# Altium PCB ampPcb.PcbDoc
Units mil, origin at the board's own origin, x right, y up, seen from the top; angles counter-clockwise.
Board outline 6000 x 4000 mil, 2 copper layers (Top Layer, Bottom Layer); 72 components, 50 nets, 181 pads, 0 vias.
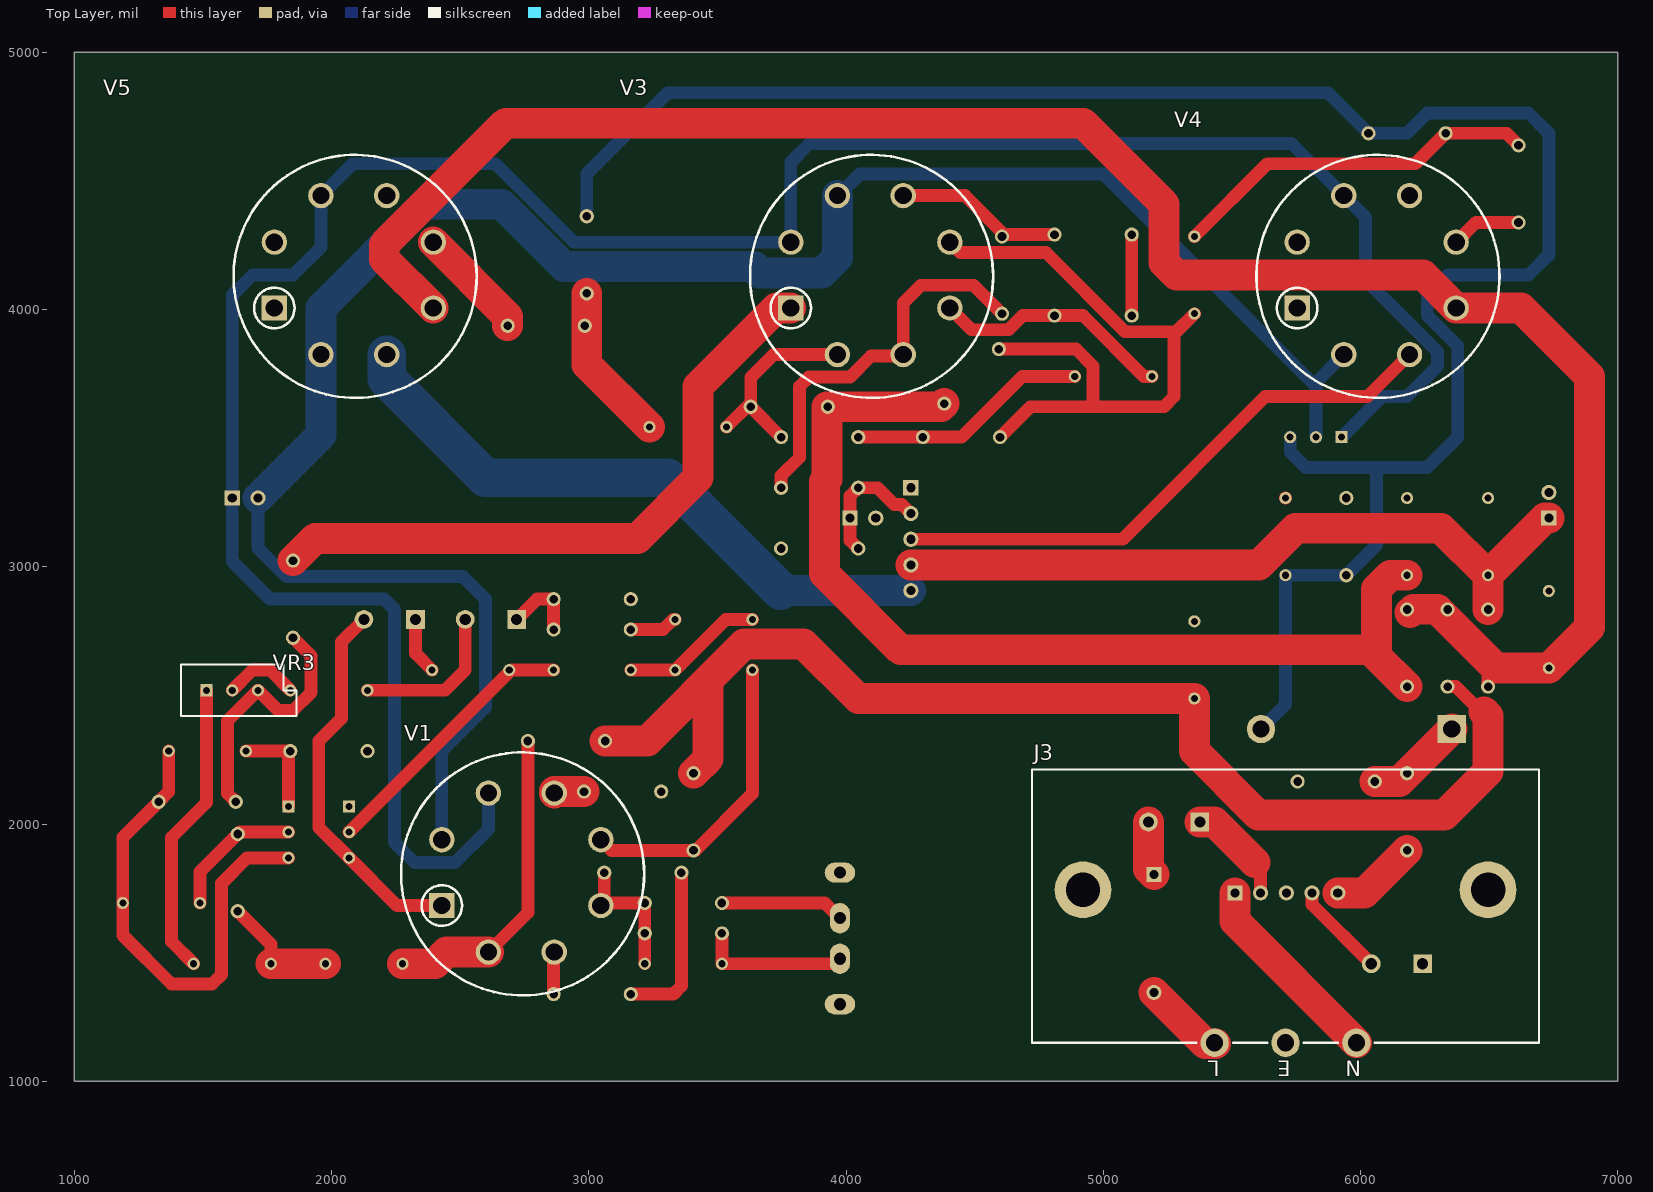
[diagram p0: Top Layer view]
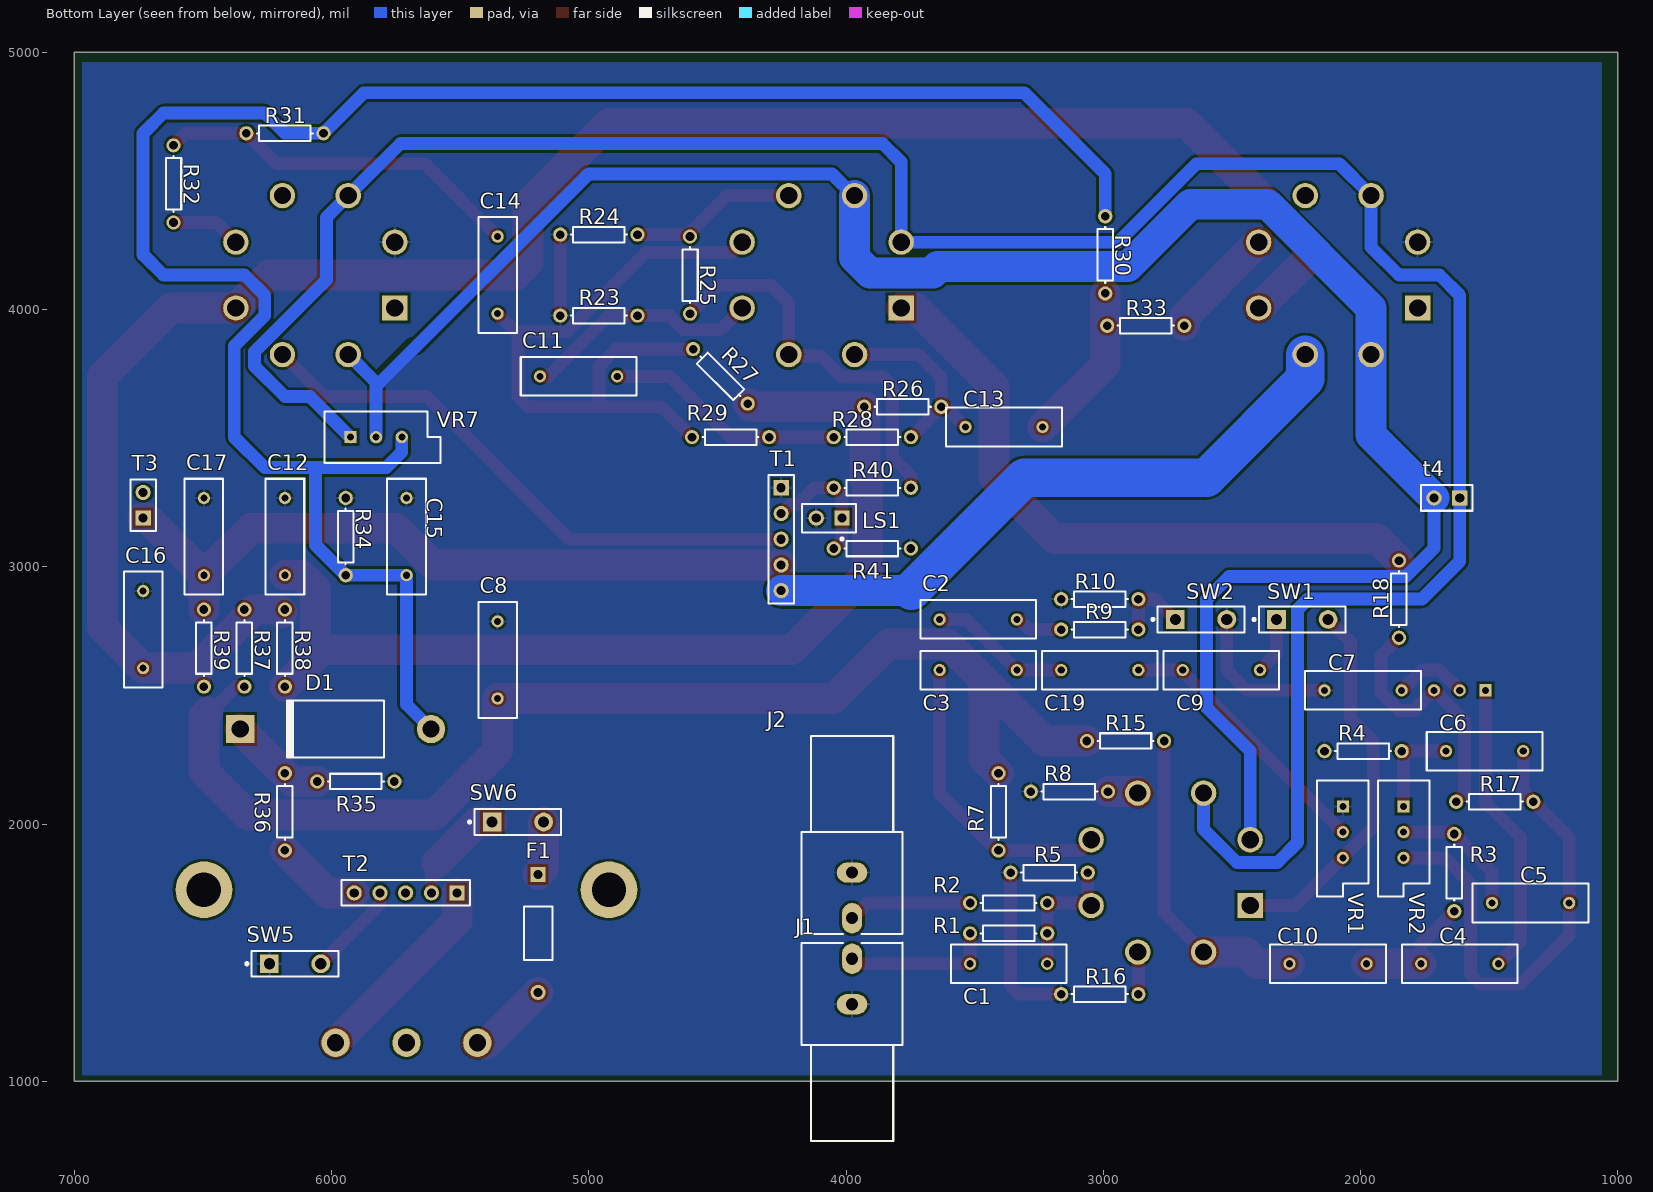
[diagram p1: Bottom Layer view, seen from below]
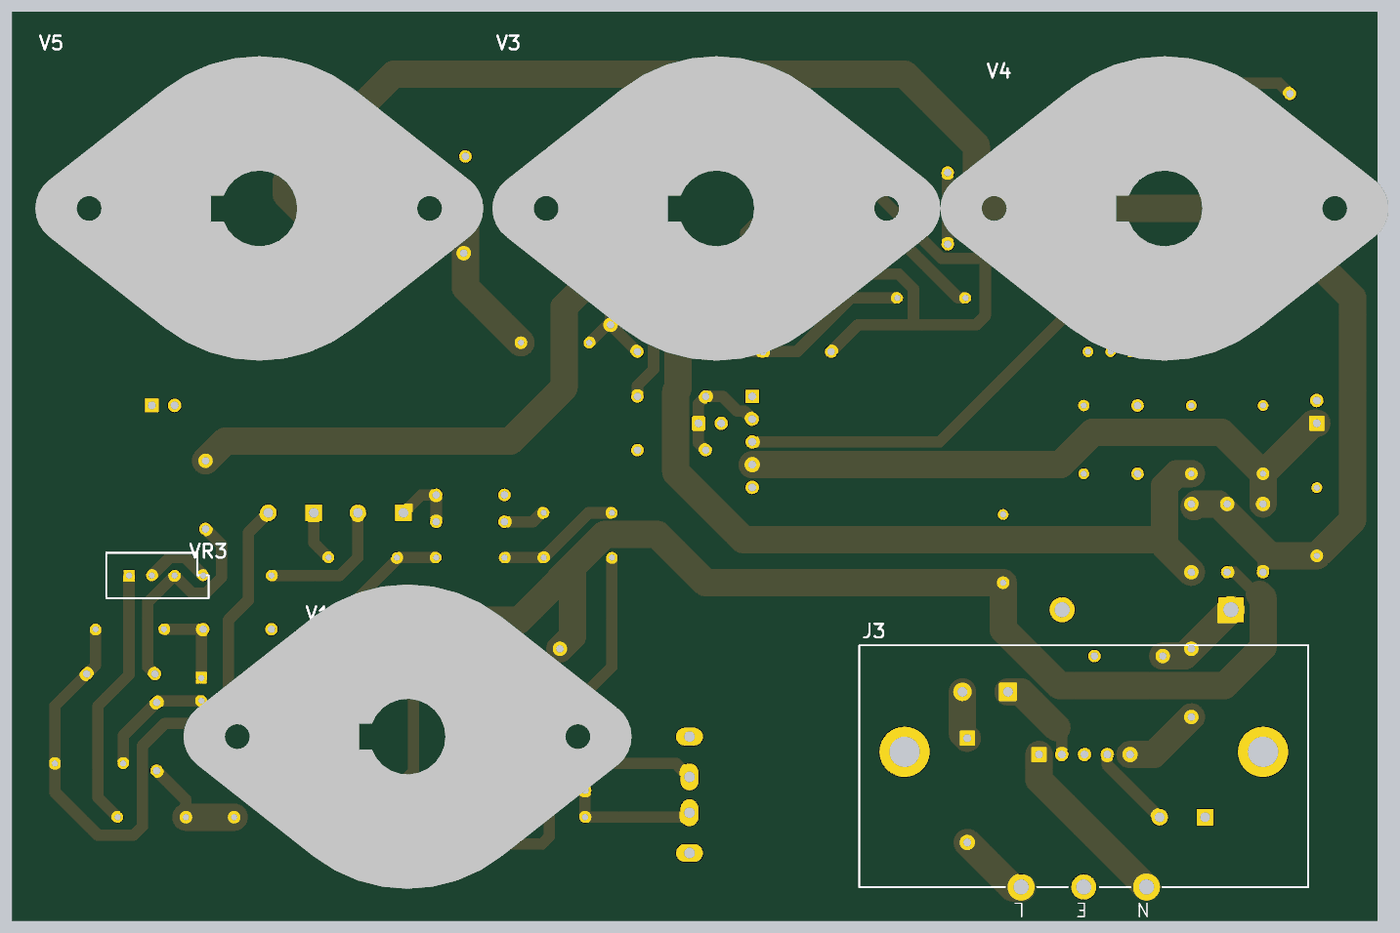
[diagram p2: 3D render of the assembled board from above, using the file's embedded part models]

## Layer stack, top to bottom
Top Layer: signal copper 1.4
Dielectric: dielectric 12.6, FR-4, Dk 4.8
Bottom Layer: signal copper 1.4

## Board outline
1000,1000 7000,1000 7000,5000 1000,5000

## Design rules (kind name [scope] priority, off if disabled: settings)
Clearance [All] p1: gap=10
PolygonConnect [All] p1: connectstyle=Relief reliefconductorwidth=10 reliefentries=4 polygonreliefangle="90 Angle"
RoomDefinition Designator [InComponentClass('Designator')] p1: confinementstyle=ConfineIn formatcopy=TRUE lockcomponents=FALSE outline 6968.5,3510.83 4173.23,3510.83 4173.23,991.14 6968.5,991.14
RoomDefinition PA [InComponentClass('PA')] p2: confinementstyle=ConfineIn formatcopy=TRUE lockcomponents=FALSE outline 1023.62,1023.62 3818.9,1023.62 3818.9,3031.5 1023.62,3031.5
RoomDefinition main [InComponentClass('main')] p3: confinementstyle=ConfineIn formatcopy=TRUE lockcomponents=FALSE outline 4488.19,2716.54 4409.45,2716.54 4409.45,2952.76 4488.19,2952.76
RoomDefinition A [InComponentClass('A')] p4: confinementstyle=ConfineIn formatcopy=TRUE lockcomponents=FALSE outline 1062.99,3449.61 6850.39,3449.61 6850.39,4921.26 1062.99,4921.26
RoutingVias [All] p1: holewidth=28 width=50 viastyle="Through Hole" minholewidth=28 minwidth=50 maxholewidth=28 maxwidth=50
SilkscreenOverComponentPads [All] p1: minsilkscreentomaskgap=10
SolderMaskExpansion [All] p1: expansion=4
Width [All] p1: maxlimit=120 minlimit=10 preferedwidth=50
27 further rules are at their usual default settings.

## Classes and differential pairs
component class Designator: C8 C12 C15 C16 C17 D1 F1 J3 R34 R35 R36 R37 R38 R39 SW5 SW6 T2 T3 t4 VR7
component class PA: C1 C2 C3 C4 C5 C6 C7 C9 C10 C19 R1 R2 R3 R4 R5 R7 R8 R9 R10 R15 R16 R17 R18 SW1 SW2 V1 VR1 VR2 VR3
component class main: J1 J2 LS1
component class A: C11 C13 C14 R23 R24 R25 R26 R27 R28 R29 R30 R31 R32 R33 R40 R41 T1 V3 V4 V5

## Components (designator, comment, footprint, x,y, rotation, side; value= is the part's Value field where it differs from the comment)
C1 "Cap" RAD-0.3#1 3367.72,1456.69 r270 bottom
C2 "Cap" RAD-0.3#2 3485.83,2795.28 r0 bottom
C3 "Cap" RAD-0.3#2 3485.83,2598.43 r180 bottom
C4 "Cap" RAD-0.3#2 1614.17,1456.69 r0 bottom
C5 "Cap" RAD-0.3#2 1338.58,1692.91 r180 bottom
C6 "Cap" RAD-0.3#2 1517.32,2283.46 r180 bottom
C7 "Cap" RAD-0.3#2 1989.76,2519.68 r180 bottom
C8 "500V" RAD-0.3#1 5354.33,2637.8 r180 bottom
C9 "Cap" RAD-0.3#2 2540.94,2598.43 r0 bottom
C10 "Cap" RAD-0.3#2 2125.98,1456.69 r180 bottom
C11 "Cap" RAD-0.3#1 5039.37,3740.16 r270 bottom
C12 "500V" RAD-0.3#1 6181.1,3117.13 r180 bottom
C13 "Cap" RAD-0.3#1 3385.83,3543.31 r90 bottom
C14 "Cap" RAD-0.3#1 5354.33,4133.86 r0 bottom
C15 "100V" RAD-0.3#1 5708.66,3117.13 r180 bottom
C16 "500V" RAD-0.3#1 6732.28,2755.91 r180 bottom
C17 "600V" RAD-0.3#1 6496.06,3117.13 r180 bottom
C19 "Cap" RAD-0.3#2 3013.39,2598.43 r180 bottom
D1 "Diode 1N5406" DO-201AD 5984.25,2369.09 r0 bottom
F1 "Fuse 2" PIN-W2/E2.8 5196.85,1574.8 r270 bottom
J1 "RCA" RCA/4.5-H2 3976.38,1141.73 r270 bottom
J2 "RCA" RCA/4.5-H2 3976.38,1968.5 r90 bottom
J3 "Plug AC Female" IEC7-2H3 5708.66,2086.61 r90 top
LS1 "Speaker" PIN2 4015.75,3188.98 r0 bottom
R1 "Res1" AXIAL-0.3#1 3367.72,1574.8 r180 bottom
R2 "Res1" AXIAL-0.3#1 3367.72,1692.91 r180 bottom
R3 "Res1" AXIAL-0.3#1 1635.43,1811.02 r270 bottom
R4 "Res1" AXIAL-0.3#2 1989.76,2283.46 r90 bottom
R5 "Res1" AXIAL-0.3#1 3210.24,1811.02 r180 bottom
R7 "Res1" AXIAL-0.3#1 3407.09,2047.24 r90 bottom
R8 "Res1" AXIAL-0.3#1 3131.5,2125.98 r180 bottom
R9 "Res1" AXIAL-0.3#1 3013.39,2755.91 r0 bottom
R10 "Res1" AXIAL-0.3#2 3013.39,2874.02 r90 bottom
R15 "Res1" AXIAL-0.3#1 2913.39,2322.83 r0 bottom
R16 "Res1" AXIAL-0.3#1 3013.39,1338.58 r180 bottom
R17 "Res1" AXIAL-0.3#1 1477.95,2086.61 r0 bottom
R18 "Res1" AXIAL-0.3#1 1850.39,2874.02 r90 bottom
R23 "Res1" AXIAL-0.3#2 4960.63,3976.38 r270 bottom
R24 "Res1" AXIAL-0.3#2 4960.63,4291.34 r270 bottom
R25 "Res1" AXIAL-0.3#2 4606.3,4133.86 r180 bottom
R26 "Res1" AXIAL-0.3#2 3779.53,3622.05 r90 bottom
R27 "Res1" AXIAL-0.3#2 4488.19,3740.16 r135 bottom
R28 "Res1" AXIAL-0.3#2 3897.64,3503.94 r270 bottom
R29 "Res1" AXIAL-0.3#2 4448.82,3503.94 r270 bottom
R30 "Res1" AXIAL-0.3#1 2992.13,4212.6 r270 bottom
R31 "Res1" AXIAL-0.3#1 6181.1,4685.04 r180 bottom
R32 "Res1" AXIAL-0.3#2 6614.17,4488.19 r0 bottom
R33 "Res1" AXIAL-0.3#1 2834.65,3937.01 r0 bottom
R34 "Res1" AXIAL-0.3#2 5944.88,3117.13 r180 bottom
R35 "Res1" AXIAL-0.3#2 5905.51,2165.35 r270 bottom
R36 "2W" AXIAL-0.3#1 6181.1,2047.24 r90 bottom
R37 "Res1" AXIAL-0.3#2 6338.58,2684.06 r0 bottom
R38 "Res1" AXIAL-0.3#2 6181.1,2684.05 r0 bottom
R39 "10W" AXIAL-0.3#2 6496.06,2684.05 r180 bottom
R40 "Res1" AXIAL-0.3#2 3897.64,3307.09 r90 bottom
R41 "10W 1%" AXIAL-0.3#2 3897.64,3070.87 r270 bottom
SW1 "SW-SPST" SPST-2#1 2225.98,2795.28 r180 bottom
SW2 "SW-SPST" SPST-2#1 2619.69,2795.28 r180 bottom
SW5 "SW-SPST" SPST-2#2 6141.73,1456.69 r90 bottom
SW6 "SW-SPST" SPST-2#1 5275.59,2007.87 r180 bottom
T1 "Trans CT" HDR1X5 4251.97,3307.09 r270 bottom
T2 "Trans CT" HDR1X5 5511.81,1732.28 r0 bottom
T3 "Inductor" HDR1X2 6732.28,3188.98 r90 bottom
t4 "Inductor" HDR1X2 1614.17,3267.72 r0 bottom
V1 "6SL7" OCTALSOCKET 2737.8,1811.02 r90 top
V3 "6SL7" OCTALSOCKET 4094.49,4133.86 r90 top
V4 "Tube 6L6GC" OCTALSOCKET 6062.99,4133.86 r90 top
V5 "Tube 6L6GC" OCTALSOCKET 2086.61,4133.86 r90 top
VR1 "RPot" VR5#1 2068.5,1968.5 r180 bottom
VR2 "RPot" VR5#2 1832.28,1968.5 r270 bottom
VR3 "RPot" VR5#2 1614.17,2519.68 r0 top
VR7 "RPot" VR5#1 5826.77,3503.94 r90 bottom

## Footprints (in the part's own frame and the unit in brackets; to place one, negate y for a bottom-side part, rotate by r counter-clockwise, add the part's x,y. Pads: shape width x height; smd on the part's side, far side on the other; paste and mask are expansions set on the pad)
AXIAL-0.3#1 [mm] "Axial Device, Thru-Hole; 2 Leads; 0.3 in Pin Spacing"
  round 1.4 hole 0.85: 1(-3.81,0) 2(3.81,0)
  silkscreen extent -2.77,-0.76 2.77,0.76
AXIAL-0.3#2 [mm] "Axial Device, Thru-Hole; 2 Leads; 0.3 in Pin Spacing"
  round 1.4 hole 0.85: 1(0,3.81) 2(0,-3.81)
  silkscreen extent -0.76,-2.77 0.76,2.77
DO-201AD [mm] "Diode, Axial; Body 9.5 x 5.6 mm (LxDia. max), Lead Dia. 1.32 mm (max)"
  round 2.8 hole 1.7: 1(-9.42,0)
  rect 2.8x2.8 hole 1.7: 2(9.42,0)
  silkscreen extent -4.8,-2.8 4.9,2.8
HDR1X2 [mm] "Connector; Header; 2 Position"
  rect 1.5x1.5 hole 0.9: 1(0,0)
  round 1.5 hole 0.9: 2(2.54,0)
  silkscreen extent -1.27,-1.27 3.81,1.27
HDR1X5 [mm] "Connector; Header; 5 Position"
  rect 1.5x1.5 hole 0.9: 1(0,0)
  round 1.5 hole 0.9: 2(2.54,0) 3(5.08,0) 4(7.62,0) 5(10.16,0)
  silkscreen extent -1.27,-1.27 11.43,1.27
IEC7-2H3 [mm] "Mains Power Outlet, IEC60 320-2-2 F, PC Flange Rear Mount"
  round 2.8 hole 1.7: 1(-23.8,7) 2(-23.8,-7) 3(-23.8,0)
  round 5.6 hole 3.4: MH1(-8.7,20) MH2(-8.7,-20)
  silkscreen extent -23.8,-25.05 3.2,25.05
OCTALSOCKET [mm]
  rect 2.5x2.5 hole 1.7: 1(-3.25,7.85)
  round 2.5 hole 1.7: 2(-7.85,3.25) 3(-7.85,-3.25) 4(-3.25,-7.85) 5(3.25,-7.85) 6(7.85,-3.25) 7(7.85,3.25) 8(3.25,7.85)
  silkscreen extent -12.13,-12.13 11.87,11.87, body extent -17,-25 17,25, height 18.01
PIN2 [mm] "Photosensitive Diode; 2 Leads"
  rect 1.5x1.5 hole 0.9: 1(0,0)
  round 1.5 hole 0.9: 2(2.54,0)
  silkscreen extent -1.4,-1.4 3.94,2.17
PIN-W2/E2.8 [mm] "Thru-Hole; 2 Leads"
  rect 1.5x1.5 hole 0.9: 1(-5.825,0)
  round 1.5 hole 0.9: 2(5.825,0)
  silkscreen extent -2.65,-1.4 2.65,1.4
RAD-0.3#1 [mm] "Radial Cap, Thru-Hole; 2 Leads; 0.3 in Pin Spacing"
  round 1.2 hole 0.7: 1(0,3.81) 2(0,-3.81)
  silkscreen extent -1.91,-5.71 1.91,5.71
RAD-0.3#2 [mm] "Radial Cap, Thru-Hole; 2 Leads; 0.3 in Pin Spacing"
  round 1.2 hole 0.7: 1(-3.81,0) 2(3.81,0)
  silkscreen extent -5.71,-1.91 5.71,1.91
RCA/4.5-H2 [mm] "Two Conductor Jack (RCA), Right Angle, Thru-Hole, Body 10 x 10 x 13 mm (WxTxH)"
  oval 2x3 hole 1.2: 1A(-4,0)
  oval 3x2 hole 1.2: 2B(-8.496,0)
  silkscreen extent -10.07,-5 9.5,5
SPST-2#1 [mm] "Switch; 2 Leads"
  rect 1.85x1.85 hole 1.1: 1(-2.54,0)
  round 1.85 hole 1.1: 2(2.54,0)
  silkscreen extent -4.89,-1.27 4.28,1.27
SPST-2#2 [mm] "Switch; 2 Leads"
  rect 1.85x1.85 hole 1.1: 1(0,2.54)
  round 1.85 hole 1.1: 2(0,-2.54)
  silkscreen extent -1.27,-4.28 1.27,4.89
VR5#1 [mm] "Thru-Hole; 3 Leads"
  rect 1.2x1.2 hole 0.7: 1(0,2.54)
  round 1.2 hole 0.7: 2(0,0) 3(0,-2.54)
  silkscreen extent -2.54,-6.35 2.54,5.08
VR5#2 [mm] "Thru-Hole; 3 Leads"
  rect 1.2x1.2 hole 0.7: 1(-2.54,0)
  round 1.2 hole 0.7: 2(0,0) 3(2.54,0)
  silkscreen extent -5.08,-2.54 6.35,2.54

## Part data
C1 C2 C3 C4 C5 C6 C7 C9 C10 C11 C13 C14 C19: "Capacitor"
C8 C12 C15 C16 C17: library part Cap, "Capacitor"
D1: "3 Amp General Purpose Rectifier"
F1: "Fuse"
J1 J2: "RCA Phono Jack, Right Angle, Thru-Hole, Snap-In"
J3: "IEC Mains Power Outlet, EN60 320-2-2 F Class I, PC Flange Rear Mount, Chassis Socket"
LS1: "Loudspeaker"
R1 R2 R3 R4 R5 R7 R8 R9 R10 R15 R16 R17 R18 R23 R24 R25 R26 R27 R28 R29 R30 R31 R32 R33 R34 R35 R37 R38 R40: "Resistor"
R36 R39 R41: library part Res1, "Resistor"
SW1 SW2 SW5 SW6: "Single-Pole, Single-Throw Switch"
T1 T2: "Center-Tapped Transformer (Coupled Inductor Model)"
V4 V5: "Beam Power Pentode"
VR1 VR2 VR3 VR7: "Potentiometer"

## Nets (pads, with @x,y where several pads share a name; then routed paths per layer and width w, separated by ;. In a path a pad name is that pad's centre, name@x,y a point inside that pad or via, vN(x,y) a via of type N, cw(c..) or ccw(c..) an arc to the next point about the centre after c; other vN are vias at no path point)
165V: C3.1 R7.1 V1.5 | length 1177.8
  Top Layer w50: V1.5 3088.58,1897.24 R7.1 3414.57,1897.24 3635.83,2118.5 C3.1
175V: C10.1 R15.1 V1.2 | length 1237.1
  Top Layer w50: V1.2 2763.39,1655.51 R15.1
  Top Layer w120: C10.1 2401.57,1456.69 2446.85,1501.97 V1.2
225V: C14.1 R27.1 R29.2 V3.5 | length 2676.5
  Top Layer w50: V3.5 4444.06,4221.3 4777.24,4221.3 5084.72,3913.82 5259.41,3913.82 ; R27.1 4893.93,3846.22 4960.63,3779.53 4960.63,3622.05 ; R29.2 4716.93,3622.05 4960.63,3622.05 ; C14.1 5284.29,3913.82 5259.41,3913.82 ; 4960.63,3622.05 5236.22,3622.05 5275.59,3661.42 5275.59,3897.64 5259.41,3913.82
235V: C13.1 R26.2 R28.1 V3.2 | length 787.1
  Top Layer w50: C13.1 R26.2@3629.53,3637.01 ; R28.1 R26.2 R26.2@3629.53,3637.01 ; V3.2 3718.74,3824.8 3629.53,3735.59 3629.53,3661.42 R26.2@3629.53,3637.01
+445V: C16.2 R37.2 R38.2 R39.2 V4.4 V5.4 | length 7689.2
  Top Layer w50: R39.2 6496.06,2637.8 ; C16.2 C16.2@6748.23,2621.85
  Top Layer w120: V5.4 2204.72,4196.85 2204.72,4251.97 2677.17,4724.41 4921.26,4724.41 5236.22,4409.45 5236.22,4182.01 5284.37,4133.86 6244.09,4133.86 V4.4 6624.02,4005.91 6889.76,3740.16 6889.76,2763.39 C16.2@6748.23,2621.85 ; R38.2@6192.99,2822.17 6205.47,2834.65 6299.21,2834.65 6496.06,2637.8 6527.95,2605.91 C16.2
-50V: C15.2 D1.1 R30.1 R31.2 R34.2 VR7.3 | length 7900.3
  Bottom Layer w50: R30.1 2992.13,4527.56 3307.09,4842.52 5873.62,4842.52 R31.2 6181.1,4685.04 6259.84,4763.78 6653.54,4763.78 6732.28,4685.04 6732.28,4212.6 6653.54,4133.86 6338.58,4133.86 6259.84,4055.12 6259.84,3976.38 6377.95,3858.27 6377.95,3503.94 6259.84,3385.83 6062.99,3385.83 ; D1.1 5708.66,2464.37 C15.2 R34.2 6062.99,3085.24 6062.99,3385.83 ; VR7.3 5726.77,3446.46 5787.4,3385.83 6062.99,3385.83
AC_+: F1.2 J3.1 | length 322.9
  Top Layer w120: F1.2 5396.65,1145.67 J3.1@5437.01,1145.67
AC_+_FUSE: F1.1 SW6.2 | length 212.5
  Top Layer w120: SW6.2 5175.59,1825.39 F1.1
AC_EN: SW6.1 T2.2 | length 369.6
  Top Layer w50: T2.2 5611.81,1821.65
  Top Layer w120: SW6.1 5433.07,2007.87 5590.55,1850.39
AC_NEG: J3.2 T2.1 | length 778.4
  Top Layer w120: T2.1 5511.81,1622.05 J3.2
BASSBOOST: C5.2 C6.2 R17.1 VR2.3 | length 1923.1
  Top Layer w50: C6.2 1367.32,2125.98 R17.1 1188.58,1947.24 C5.2 1188.58,1567.32 1377.95,1377.95 1535.43,1377.95 1572.87,1415.39 1572.87,1769.72 1671.65,1868.5 VR2.3
CATRES: R8.2 V1.6 | length 121.7
  Top Layer w120: V1.6 2865.75,2125.98 R8.2
CATRES2: R16.2 V1.3 | length 164.4
  Top Layer w50: R16.2 2863.39,1499.61 V1.3
FEEDBACK: R25.2 R40.2 V3.3 | length 1528.8
  Top Layer w50: R40.2 3747.64,3353.94 3818.9,3425.2 3818.9,3700.79 3855.21,3737.1 4015.75,3737.1 4097.54,3818.9 V3.3@4216.54,3818.9 ; V3.3 4222.44,4025.59 4291.34,4094.49 4495.67,4094.49 R25.2
FEEDBACK_INV: R24.1 R25.1 V3.6 | length 651
  Top Layer w50: V3.6 4462.2,4442.91 4613.78,4291.34 R24.1
GATETPULL: R32.1 V4.5 | length 273.8
  Top Layer w50: V4.5 6448.43,4338.19 R32.1
GATETPULLRES: C14.2 R31.1 R32.2 | length 1445.4
  Top Layer w50: C14.2 5637.4,4566.93 6212.99,4566.93 R31.1 6567.32,4685.04 R32.2
GATETPUSH: R33.1 V5.5 | length 444.5
  Top Layer w120: V5.5 2684.65,3972.83 R33.1
GATETPUSHRES: C13.2 R30.2 R33.2 | length 620.2
  Top Layer w120: R30.2 2992.13,3787.01 C13.2
GND: C7.1 C8.1 C12.1 C15.1 C16.1 C17.1 J1.1A J2.1A LS1.2 R4.1 R5.1 R8.1 R10.1 R16.1 R23.2 R24.2 R34.1 R35.1 R41.1 SW2.2 SW5.1 T1.1 V4.8 V5.8 VR1.1 | length 1575
  Top Layer w50: C7.1 2440.94,2519.68 2519.69,2598.43 SW2.2 ; R16.1 3328.35,1338.58 3360.24,1370.47 R5.1 ; R23.2 R24.2
HC_PULL: T1.3 V4.3 | length 2236.3
  Top Layer w50: T1.3 5075.59,3107.09 5629.92,3661.42 6027.56,3661.42 V4.3
HC_PUSH: T1.5 V5.3 | length 2472.9
  Bottom Layer w120: 3746.46,2907.09 T1.5
  Bottom Layer w150: V5.3 2214.57,3730.32 2598.43,3346.46 3307.09,3346.46 3746.46,2907.09
NetC1_2: C1.2 J1.2B R1.1 | length 584.9
  Top Layer w50: R1.1 C1.2 3956.85,1456.69 J1.2B
NetC2_1: C2.1 R9.2 | length 188.7
  Top Layer w50: R9.2 3288.98,2755.91 3328.35,2795.28 C2.1
NetC2_2: C2.2 C3.2 C19.1 | length 554
  Top Layer w50: C19.1 C3.2 3532.68,2795.28 C2.2
NetC5_1: C5.1 R3.1 VR2.2 | length 528.9
  Top Layer w50: C5.1 1488.58,1814.17 1642.91,1968.5 VR2.2
NetC6_1: C6.1 R4.2 VR2.1 | length 379.9
  Top Layer w50: C6.1 R4.2 ; VR2.1 R4.2@1832.28,2275.98
NetC11_1: C11.1 R28.2 R29.1 | length 939.6
  Top Layer w50: R28.2 R29.1 4448.82,3503.94 4685.04,3740.16 C11.1
NetC11_2: C11.2 R23.1 V3.4 | length 941.5
  Top Layer w50: V3.4 4488.15,3921.3 4632.21,3921.3 4687.29,3976.38 R23.1 4921.26,3976.38 5157.48,3740.16 C11.2
NetC17_2: C17.2 R39.1 T1.4 T3.1 | length 2839.9
  Top Layer w120: T1.4 5605.51,3007.09 5748.03,3149.61 6313.58,3149.61 C17.2 ; R39.1 C17.2 ; T3.1 6717.91,3188.98 C17.2
NetD1_2: D1.2 R35.2 R36.2 | length 384
  Top Layer w120: R35.2 6151.38,2165.35 D1.2
NetJ2_2B: J2.2B R2.1 | length 483.1
  Top Layer w50: R2.1 3917.48,1692.91 J2.2B
NetSW1_2: SW1.2 V1.1 VR1.3 | length 1485.5
  Top Layer w50: SW1.2 2038.19,2707.48 2038.19,2410.63 1950.39,2322.83 1950.39,1986.61 VR1.3 2253.94,1683.07 V1.1
PAGATE: C1.1 R1.2 R2.2 R5.2 V1.4 | length 516.8
  Top Layer w50: R5.2 3060.24,1696.46 3056.69,1692.91 R2.2 R1.2 C1.1
PLATEPOWER: C12.2 R26.1 R27.2 R38.1 | length 3912.8
  Top Layer w120: R27.2 4370.08,3622.05 3925.44,3622.05 3925.44,3340.03 3916.22,3330.81 3916.22,2973.54 4212.6,2677.17 6023.62,2677.17 ; R38.1 6062.99,2652.17 6062.99,2913.39 6116.73,2967.13 C12.2
PLATEPRE: C8.2 R7.2 R15.2 R37.1 | length 4845.6
  Top Layer w50: R37.1 6370.47,2534.06 6456.69,2447.83 6456.69,2436.5
  Top Layer w120: R15.2 3228.35,2322.83 3407.09,2501.57 3407.09,2504.03 3463.34,2560.29 ; R7.2 3463.34,2253.49 3463.34,2560.29 ; 6480.24,2436.5 6496.06,2420.67 6496.06,2204.72 6326.69,2035.35 5602.44,2035.35 5354.33,2283.46 C8.2 4047.64,2487.8 3835.16,2700.28 3603.33,2700.28 3463.34,2560.29
PREAMPSIG: R18.2 V3.1 | length 2549.3
  Top Layer w120: R18.2 1936.61,3110.24 3188.98,3110.24 3425.2,3346.46 3425.2,3700.79 3730.32,4005.91 V3.1
PT_+: R36.1 T2.5 | length 337.6
  Top Layer w120: T2.5 6016.14,1732.28 R36.1
PT_-: T2.3
PT_STANDBY: SW5.2 T2.4 | length 370.8
  Top Layer w50: T2.4 5811.81,1686.61 SW5.2
SIGDECOUPLED: C4.2 C10.2 R3.2 | length 469.5
  Top Layer w50: R3.2 1764.17,1532.28 C4.2
  Top Layer w120: C4.2 C10.2
SPK+: LS1.1 R40.1 R41.2 T1.2 | length 508.4
  Top Layer w50: R41.2 4015.75,3102.76 LS1.1 4015.75,3275.2 R40.1 4122.91,3307.09 4187.44,3242.56 4216.5,3242.56 T1.2
TRBOOST: C7.2 VR3.2 | length 290.8
  Top Layer w50: VR3.2 1692.91,2598.43 1761.02,2598.43 C7.2
TRCUT: C4.1 VR3.1 | length 1155.1
  Top Layer w50: C4.1 1377.95,1542.91 1377.95,1947.24 1514.17,2083.46 VR3.1
TREBC: R17.2 R18.1 VR3.3 | length 1004.8
  Top Layer w50: R17.2 1596.06,2118.5 1596.06,2401.57 VR3.3 1792.91,2440.94 1850.39,2440.94 1920.08,2510.63 1920.08,2654.33 R18.1
TUBEH+: t4.1 V1.7 V3.8 V4.7 V5.7 VR7.1 | length 9741.5
  Bottom Layer w50: V1.7 2609.84,1979.92 2480.32,1850.39 2322.83,1850.39 2244.09,1929.13 2244.09,2834.65 2204.72,2874.02 1761.58,2874.02 1614.17,3021.42 t4.1 1614.17,4055.12 1692.91,4133.86 1850.39,4133.86 1958.66,4242.12 V5.7 2082.68,4566.93 2637.8,4566.93 2942.91,4261.81 V3.8 3785.43,4572.83 3858.27,4645.67 5732.28,4645.67 V4.7 6019.25,4358.7 6019.25,4115.59 6299.21,3835.63 6299.21,3779.53 6181.1,3661.42 6084.25,3661.42 VR7.1
TUBEH-: t4.2 V1.8 V3.7 V4.2 V5.2 VR7.2 | length 8167.9
  Bottom Layer w50: t4.2 1714.17,3071.76 1824.48,2961.46 2510.98,2961.46 2598.43,2874.02 2598.43,2453.15 2428.74,2283.46 V1.8 ; V3.7 3970.47,4442.91 4055.12,4527.56 5000,4527.56 5818.9,3708.66 V4.2 ; VR7.2 5826.77,3716.54
  Bottom Layer w120: t4.2 1958.66,3512.2 V5.2 1958.66,4005.9 2362.2,4409.45 2660.93,4409.45 2903.56,4166.81 3644.09,4166.81 3668.31,4142.6 ; 3661.42,4142.6 3906.38,4142.6 3966.54,4202.76 V3.7
ULTHISW: C9.1 SW1.1 | length 223.8
  Top Layer w50: SW1.1 2325.98,2663.39 C9.1
ULTLOSW: R9.1 R10.2 SW2.1 | length 294.4
  Top Layer w50: SW2.1 2798.43,2874.02 R10.2 R9.1
VOLFEED: C9.2 C19.2 VR1.2 | length 1055.8
  Top Layer w50: VR1.2 2698.43,2598.43 C19.2
pads on no net: J3.3 J3.MH1 J3.MH2 T3.2 V4.1 V4.6 V5.1 V5.6

## Polygon pours and split planes (outlines as drawn)
GND on Bottom Layer "Bottom Layer-No Net" (solid, pour order 2): 1062.99,4921.26 1062.99,1023.62 6968.5,1023.62 6968.5,4960.63 1062.99,4960.63

## Text inside footprints (layer, text, board x,y; h text height)
J1: Mechanical 1 "Mech 2 - Clearance, move to internal plane if present" at 3726.69,1537.66 h11.81 r90; Mechanical 1 "Mech 1 - Slot cut-out" at 3707.01,1537.66 h11.81 r90; Mechanical 1 "Assign keep-out area to slot" at 3647.95,1537.66 h11.81 r90; Mechanical 1 "Slot 1.2x2.2mm, PTH" at 3687.32,1537.66 h11.81 r90; Mechanical 1 "Alert PCB fab to slot details" at 3667.64,1537.66 h11.81 r90; Mechanical 1 "PCB Edge" at 4158.18,1154.85 h9.84
J2: Mechanical 1 "Mech 2 - Clearance, move to internal plane if present" at 4226.06,1572.57 h11.81 r270; Mechanical 1 "Mech 1 - Slot cut-out" at 4245.75,1572.57 h11.81 r270; Mechanical 1 "Assign keep-out area to slot" at 4304.8,1572.57 h11.81 r270; Mechanical 1 "Slot 1.2x2.2mm, PTH" at 4265.43,1572.57 h11.81 r270; Mechanical 1 "Alert PCB fab to slot details" at 4285.12,1572.57 h11.81 r270; Mechanical 1 "PCB Edge" at 3794.57,1955.39 h9.84 r180
J3: Top Overlay "L" at 5452.76,1078.74 h59.06 r180; Top Overlay "E" at 5728.35,1078.74 h59.06 r180; Top Overlay "N" at 6003.94,1078.74 h59.06 r180; Mechanical 1 "PCB Edge" at 6669.29,2070.87 h19.68 r180